# Allegro board geo-1.brd
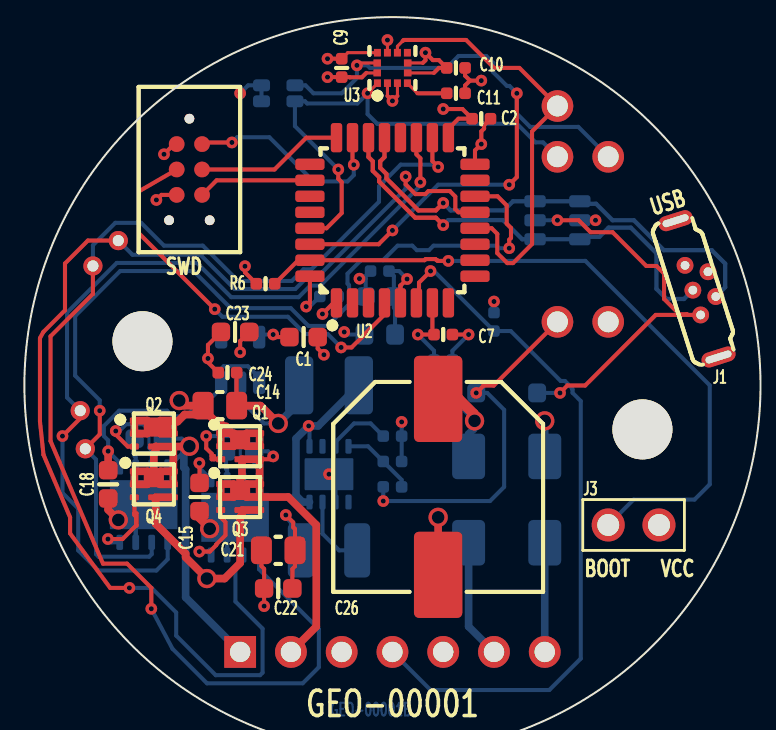
[diagram p0: board, top side]
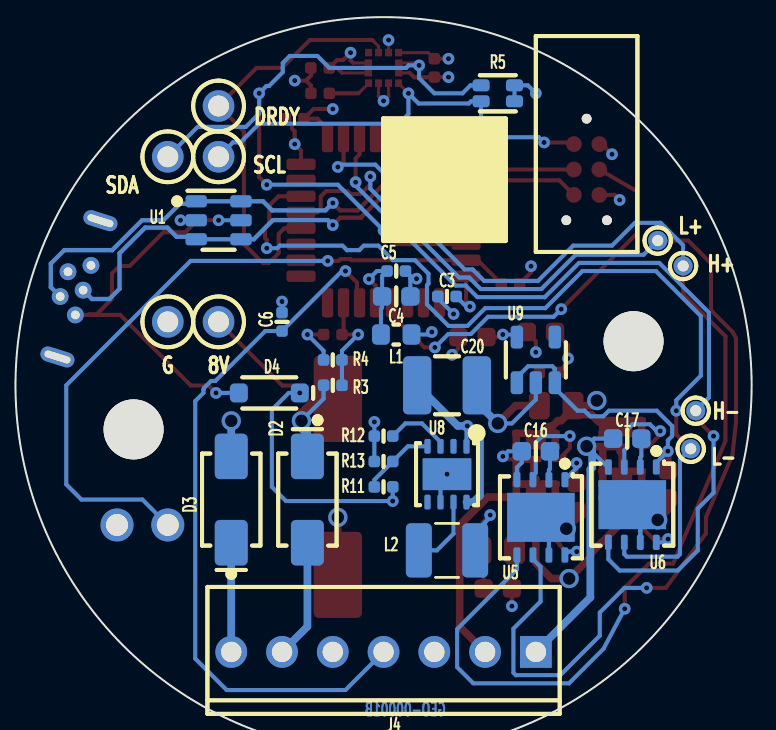
[diagram p1: board, bottom side, seen from below]

Outline 36.83 x 0 mm; copper layers: TOP, GPLANE, PPLANE, BOTTOM. Coordinates in mm from the lower left corner of the outline.

## Design rules (mm)
constraint set DEFAULT: min track width 0.203
net group DP1: nets DM DP

## Placement (name value [footprint] x y rotation side)
C1  10uF  [CAPC160X80X90L40N]  13.97 2.41 0 top
C2  0.1uF  [CAPC100X50X55L25N]  22.86 13.34 0 top
C3  0.1uF  [CAPC100X50X55L25N]  15.24 4.45 180 bottom
C4  10uF  [CAPC160X80X90L40N]  17.78 4.45 180 bottom
C5  0.1uF  [CAPC100X50X55L25N]  17.78 5.71 180 bottom
C6  1000pF  [CAPC100X50X55L25N]  23.49 3.17 90 bottom
C7  1000pF  [CAPC100X50X55L25N]  20.95 2.54 0 top
C9  0.1uF  [CAPC100X50X55L25N]  15.88 15.88 270 top
C10  0.1uF  [CAPC100X50X55L25N]  21.59 15.88 0 top
C11  0.1uF  [CAPC100X50X55L25N]  21.59 14.61 0 top
C14  1uF  [CAPC200X125X145L50N]  9.78 -1.02 0 top
C15  1uF  [CAPC160X80X90L40N]  8.76 -5.59 270 top
C16  0.1uF  [CAPC160X80X90L40N]  10.79 -3.3 0 bottom
C17  0.1uF  [CAPC160X80X90L40N]  6.22 -2.67 0 bottom
C18  1uF  [CAPC160X80X90L40N]  4.19 -4.95 270 top
C20  4.7uF  [CAPC330X260X280L60N]  15.24 0 180 bottom
C21  10uF  [CAPC200X125X145L50N]  12.7 -8.26 180 top
C22  0.1uF  [CAPC160X80X90L40N]  12.7 -10.16 180 top
C23  10uF  [CAPC160X80X90L40N]  10.54 2.67 0 top
C24  0.1uF  [CAPC100X50X55L25N]  10.16 0.64 0 top
C26  68uF  [CAPAE1030X1050L350X120N]  20.7 -5.08 270 top
D2  S1B-13-F  [DIOM519X260X240L114X145N]  22.22 -5.71 270 bottom
D3  S1B-13-F  [DIOM519X260X240L114X145N]  26.04 -5.71 90 bottom
D4  1N4148W  [SOD370X155X135L32X57]  24.13 -0.38 0 bottom
J1  614105150721  [CON_614105150721_WURTH]  33.66 4.83 107.5 top
J2  TC2030-NL  [TAG_TC2030-NL]  8.25 10.79 270 top
J3  -  [61300211121]  30.48 -6.99 180 top
J4  0022232071  [CON_0022232071_MOLEX]  10.79 -13.34 0 bottom
L1  600R@100MHz  [INDC160X80X100L30N]  17.78 2.54 0 bottom
L2  100uH  [INDC320X250X270L60N]  15.24 -8.26 180 bottom
NOREF  -  []  -101.6 -72.39 0 top
NOREF#2  -  [unnamed#2]  18.41 0 0 top
NOREF#3  -  []  18.41 13.34 180 bottom
Q1  CSD19538Q2  [XSTR_CSD19538Q2_TI]  10.79 -3.05 0 top
Q2  CSD19538Q2  [XSTR_CSD19538Q2_TI]  6.48 -2.41 0 top
Q3  CSD19538Q2  [XSTR_CSD19538Q2_TI]  10.79 -5.59 0 top
Q4  CSD19538Q2  [XSTR_CSD19538Q2_TI]  6.48 -4.95 0 top
R3  475k  [RESC100X50X40L25N]  20.95 0 180 bottom
R4  16.2k  [RESC100X50X40L25N]  20.95 1.27 0 bottom
R5  3.3k  [RESCAV4P80_165X165X70L30X60N]  12.7 14.61 270 bottom
R6  47k  [RESC100X50X40L25N]  12.06 5.08 180 top
R11  90.9k  [RESC100X50X40L25N]  18.41 -5.08 0 bottom
R12  365  [RESC100X50X40L25N]  18.41 -2.54 0 bottom
R13  10k  [RESC100X50X40L25N]  18.41 -3.81 0 bottom
TP7  TEST  [CON_TEST_POINT]  26.67 11.43 180 bottom
TP8  TEST  [CON_TEST_POINT]  29.21 11.43 180 bottom
TP9  TEST  [TP_30AWG]  3.43 5.97 180 bottom
TP10  TEST  [TP_30AWG]  4.7 7.24 180 bottom
TP11  TEST  [TP_30AWG]  3.05 -3.17 180 bottom
TP12  TEST  [TP_30AWG]  2.79 -1.27 180 bottom
TP14  TEST  [CON_TEST_POINT]  26.67 13.97 180 bottom
TP15  TEST  [CON_TEST_POINT]  29.21 3.17 180 bottom
TP16  TEST  [CON_TEST_POINT]  26.67 3.17 180 bottom
U1  USBLC6-2SC6  [SOT23-6P95_280X145L45X35N]  26.67 8.26 270 bottom
U2  STM32L412KBT6  [QFP32P80_900X900X160L60X37N]  18.41 8.26 0 top
U3  LIS3MDLTR  [PQFN12P50_200X200X70L27X25N]  18.41 15.88 0 top
U5  UCC27211ADRMR  [SON9P80_400X400X100L40X30T33-1]  10.54 -6.6 0 bottom
U6  UCC27211ADRMR  [SON9P80_400X400X100L40X30T33-1]  5.97 -5.97 0 bottom
U8  ADP2360ACPZ-R7  [SON9P65_300X300X80L40X27T244-1]  15.24 -4.45 0 bottom
U9  LT1761ES5-3.3  [SOT23-5P95_280X145L45X42N]  10.79 1.27 180 bottom

## Library data of the parts
C1-C7 C9-C11 C14-C18 C20-C24 = CAP_SHORT
C26 = CAP_POL_SHORT
D2-D4 = DIODE
J1 = CON_USB_MICROB_2_SHLD
J2 = CON6
J3 = JUMP 1x2
J4 = HEADER 7
L1 = BEAD FERRITE
L2 = IND
Q1-Q4 = NMOS_DDGSDDSD
R3 R4 R6 R11-R13 = RES
R5 = RES_DUAL
TP7-TP12 TP14-TP16 = TEST HOLE
U1 = IC_USBLC6-2_ST
U2 = IC_STM32L412KB_ST
U3 = IC_LIS3MDL_ST
U5 U6 = IC_UCC27211A_TI
U8 = IC_ADP2360_AD
U9 = IC_REG_FIXED_SOT23-5

## Footprints (pads in the part's own frame, mm; a bottom-side part is the same pattern mirrored in y, then rotated)
61300211121
  round 1.651 hole 1.1: 1(-1.27,0) 2(1.27,0)
CAPAE1030X1050L350X120N
  rrect 4.31x2.421 smd: 1(-4.399,0) 2(4.399,0)
CAPC100X50X55L25N
  rrect 0.579x0.579 smd: 1(-0.46,0) 2(0.46,0)
CAPC160X80X90L40N
  rrect 0.919x0.93 smd: 1(-0.706,0) 2(0.706,0)
CAPC200X125X145L50N
  rrect 1.049x1.379 smd: 1(-0.841,0) 2(0.841,0)
CAPC330X260X280L60N
  rrect 1.42x2.911 smd: 1(-1.491,0) 2(1.491,0)
CON_0022232071_MOLEX
  rect 1.59x1.59 hole 1.021: 1(0,0)
  round 1.59 hole 1.021: 2(2.54,0) 3(5.08,0) 4(7.62,0) 5(10.16,0) 6(12.7,0) 7(15.24,0)
CON_614105150721_WURTH
  round 0.841 hole 0.439: 1(-1.3,0.221) 2(-0.65,-0.78) 3(0,0.221) 4(0.65,-0.78) 5(1.3,0.221)
  oval 0.749x1.75 hole 0.351x1.349: 6(-3.574,0) 7(3.574,0)
CON_TEST_POINT
  round 1.58 hole 1.049: 1(0,0)
DIOM519X260X240L114X145N
  rrect 2.281x1.651 smd: 1(-2.159,0) 2(2.159,0)
INDC160X80X100L30N
  rrect 0.889x1.021 smd: 1(-0.765,0) 2(0.765,0)
INDC320X250X270L60N
  rrect 1.3x2.72 smd: 1(-1.41,0) 2(1.41,0)
PQFN12P50_200X200X70L27X25N
  rect 0.351x0.376 smd: 1(-0.75,-0.763) 2(-0.25,-0.763) 3(0.25,-0.763) 4(0.75,-0.763) 7(0.75,0.763) 8(0.25,0.763) 9(-0.25,0.763) 10(-0.75,0.763)
  rect 0.376x0.351 smd: 5(0.763,-0.25) 6(0.763,0.25) 11(-0.763,0.25) 12(-0.763,-0.25)
QFP32P80_900X900X160L60X37N
  rrect 0.569x1.46 smd: 1(-2.799,-4.13) 2(-1.999,-4.13) 3(-1.199,-4.13) 4(-0.399,-4.13) 5(0.399,-4.13) 6(1.199,-4.13) 7(1.999,-4.13) 8(2.799,-4.13) 17(2.799,4.13) 18(1.999,4.13) 19(1.199,4.13) 20(0.399,4.13) 21(-0.399,4.13) 22(-1.199,4.13) 23(-1.999,4.13) 24(-2.799,4.13)
  rrect 1.46x0.569 smd: 9(4.13,-2.799) 10(4.13,-1.999) 11(4.13,-1.199) 12(4.13,-0.399) 13(4.13,0.399) 14(4.13,1.199) 15(4.13,1.999) 16(4.13,2.799) 25(-4.13,2.799) 26(-4.13,1.999) 27(-4.13,1.199) 28(-4.13,0.399) 29(-4.13,-0.399) 30(-4.13,-1.199) 31(-4.13,-1.999) 32(-4.13,-2.799)
RESC100X50X40L25N
  rrect 0.579x0.579 smd: 1(-0.46,0) 2(0.46,0)
RESCAV4P80_165X165X70L30X60N
  rrect 0.599x0.851 smd: 1(-0.399,-0.836) 2(0.399,-0.836) 3(0.399,0.836) 4(-0.399,0.836)
SOD370X155X135L32X57
  rrect 0.899x0.95 smd: 1(-1.524,0) 2(1.524,0)
SON9P65_300X300X80L40X27T244-1
  rrect 0.31x0.739 smd: 1(-0.975,-1.394) 2(-0.325,-1.394) 3(0.325,-1.394) 4(0.975,-1.394) 5(0.975,1.394) 6(0.325,1.394) 7(-0.325,1.394) 8(-0.975,1.394)
  rrect 2.441x1.6 smd: 9(0,0)
SON9P80_400X400X100L40X30T33-1
  rrect 0.34x0.759 smd: 1(-1.199,-1.885) 2(-0.399,-1.885) 3(0.399,-1.885) 4(1.199,-1.885) 5(1.199,1.885) 6(0.399,1.885) 7(-0.399,1.885) 8(-1.199,1.885)
  rect 3.381x2.451 smd: 9(0,0)
SOT23-5P95_280X145L45X42N
  rrect 0.62x1.14 smd: 1(-0.95,-1.14) 2(0,-1.14) 3(0.95,-1.14) 4(0.95,1.14) 5(-0.95,1.14)
SOT23-6P95_280X145L45X35N
  rrect 0.61x1.069 smd: 1(-0.95,-1.12) 2(0,-1.12) 3(0.95,-1.12) 4(0.95,1.12) 5(0,1.12) 6(-0.95,1.12)
TAG_TC2030-NL
  round 0.483 hole 0.991: (-2.54,0) (2.54,1.016) (2.54,-1.016)
  round 0.787 smd: 1(-1.27,-0.635) 2(-1.27,0.635) 3(0,-0.635) 4(0,0.635) 5(1.27,-0.635) 6(1.27,0.635)
TP_30AWG
  round 0.96 hole 0.559: 1(0,0)
unnamed#2
  round 3 hole 3 unplated: (-12.507,2.205) (12.507,-2.205)
XSTR_CSD19538Q2_TI
  rrect 0.45x0.3 smd: 1(-0.975,0.65) 2(-0.975,0) 3(-0.975,-0.65) 4(0.975,-0.65) 5(0.975,0) 6(0.975,0.65)
  rrect 0.749x0.3 smd: 7(0.094,-0.65)
  rrect 1.001x0.95 smd: 8(0,0.325)

## Nets
AVCC: C4.1 C5.1 J4.5 L1.2 U2.5
GND: C1.2 C2.2 C3.2 C4.2 C5.2 C6.2 C7.2 C9.2 C10.2 C11.2 C14.2 C15.2 C18.2 C20.2 C21.2 C22.2 C23.2 C24.2 C26.2 D3.2 J1.5 J2.5 J4.3 Q3.4 Q3.7(S2) Q4.4 Q4.7(S2) R4.2 R6.2 R12.2 R13.2 TP15.1 U1.2 U2.16 U2.32 U3.2 U3.3 U3.9 U3.12 U5.7 U5.9 U6.7 U6.9 U8.6 U8.9 U9.2
V10: C15.1 C18.1 C21.1 C22.1 D4.1(K) L2.2 R11.1 TP16.1 U5.1(VD) U6.1(VD) U9.1 U9.3
VCC: C1.1 C2.1 C3.1 C9.1 C10.1 C23.1 C24.1 J2.1 J3.1 L1.1 R5.3 R5.4 U2.1 U2.17 U3.5 U3.6 U3.10 U9.5(VO)
VIN: C14.1 C20.1 C26.1 D2.1(K) Q1.1 Q1.2 Q1.5 Q1.6 Q1.8 Q2.1 Q2.2 Q2.5 Q2.6 Q2.8 R3.1 U8.1 U8.8(VIN)
VIN_MONITOR: C7.1 R3.2 R4.1 U2.7
DM: J1.2 U1.1 U1.6 U2.21
DP: J1.3 U1.3 U1.4 U2.22
DRDY: TP14.1 U2.12 U3.8
MOT_H_NEG: TP12.1 U2.19 U6.5
MOT_H_POS: TP9.1 U2.18 U5.5
MOT_L_NEG: TP11.1 U2.14 U6.6
MOT_L_POS: TP10.1 U2.13 U5.6
MOTOR+: C16.2 J4.2 Q1.4 Q1.7(S2) Q3.1 Q3.2 Q3.5 Q3.6 Q3.8 U5.4
MOTOR-: C17.2 J4.1 Q2.4 Q2.7(S2) Q4.1 Q4.2 Q4.5 Q4.6 Q4.8 U6.4
POT: C6.1 J4.4 U2.6
SCL: R5.2(B) TP7.1 U2.29 U3.1
SDA: R5.1 TP8.1 U2.30 U3.11(SDA)
N00874: Q2.3 U6.3
N00918: Q4.3 U6.8
N01958: R12.1 U8.3
N01966: R11.2 R13.1 U8.4
N02663: D2.2 J4.6
N02669: D3.1(K) J4.7
N06236: J2.2 U2.23
N06242: J2.3 U2.4
N06248: J2.4 U2.24
N06802: J2.6 U2.26(SWO)
N07422: J3.2 R6.1 U2.31
N08665: D4.2 J1.1(VB) U1.5(VB)
N019066: L2.1 U8.7
N20994: Q3.3 U5.8
N21027: Q1.3 U5.3
N21129: C16.1 U5.2
N21229: C17.1 U6.2
N103850: C11.1 U3.4

Pads without a net: J1 4 6 7; U2 2 3 8 9 10 11 15 20 25 27 28; U3 7; U8 2 5; U9 4

## Via types
v1: diameter 0.584, hole 0.254, TOP to BOTTOM, 63 vias
v2: diameter 0.965, hole 0.635, TOP to BOTTOM, 9 vias

## Routing (per net, layer and track width the routed paths; a pad name or vN(x,y) marks a point on that pad's centre or on a via; arc(x,y) is an arc through that point)
AVCC: length 10.5
  TOP w0.203: 18.82,4.99 18.81,4.98 U2.5 ; 18.82,4.99 v1(19.15,5.32) ; 18.82,4.99 18.82,4.12
  PPLANE w0.203: J4.5 20.95,-12.36 ; J4.5 20.95,-14.31 ; J4.5 19.98,-13.34 ; J4.5 21.93,-13.34
  BOTTOM w0.203: v1(19.15,5.32) 18.75,5.71 C5.1 18.49,5.47 C4.1 18.49,3.88 18.54,3.82 L1.2
GND: length 76.2
  TOP w0.152: U3.2 18.17,14.47 ; U3.3 18.66,14.47 ; U3.9 v1(18.17,17.27) ; U3.12 17.1,15.63
  TOP w0.203: C24.2 C14.2 ; C11.2 22.05,15 22.29,15.24 ; C10.2 22.05,15.48 22.29,15.24 ; v1(15.17,15.42) C9.2 16.27,15.42 16.28,15.41 16.88,15.41 17.1,15.63 ; J2.5 6.86,9.53 v1(6.6,9.27) ; v1(14.1,3.94) 14.28,4.12 U2.32 ; C1.2 14.68,1.84 v1(14.99,1.53) ; v1(11.99,-11.04) C22.2 11.99,-9.18 11.86,-9.05 C21.2 ; 18.17,14.47 v1(18.41,14.22) 18.66,14.47 ; 22.29,15.24 v1(22.86,15.24) ; C7.2 v1(22.22,2.54) ; C23.2 10.79,2.21 v1(10.79,1.66) ; R6.2 11.04,5.65 v1(11.04,5.96) ; C2.2 23,13.01 23,12.84 22.86,12.7 v1(22.86,12.06) 22.55,11.75 U2.16
  TOP w0.381: C26.2 v2(20.7,-6.6) ; Q4.4 Q4.7 6.57,-6.93 8.07,-8.42 8.07,-8.6 v2(9.13,-9.66) 10.02,-9.66 10.79,-8.89 10.79,-6.58 10.89,-6.49 Q3.7 Q3.4 ; v2(12.7,-1.91) 11.81,-1.02 C14.2 ; C15.2 8.76,-6.66 v2(9.27,-7.17) ; v2(4.7,-6.73) 4.19,-6.22 C18.2
  GPLANE w0.203: 15.88,-14.31 J4.3 ; J4.3 16.85,-13.34 ; J4.3 14.9,-13.34 ; J4.3 15.88,-12.36 ; 33.05,5.4 J1.5 ; J1.5 33.05,6.6 ; J1.5 32.45,6 ; 28.33,3.17 TP15.1 ; TP15.1 29.21,4.06 ; TP15.1 29.21,2.29 ; TP15.1 30.09,3.17
  BOTTOM w0.203: 5.57,-6.37 U6.9 5.46,-5.97 v2(4.7,-6.73) ; 5.57,-6.37 U6.7 ; 5.57,-6.37 5.57,-6.37 5.57,-7.85 ; 10.14,-7 10.14,-7.01 10.14,-8.49 ; 10.14,-7 U5.7 ; 10.14,-7 U5.9 9.84,-6.6 v2(9.27,-7.17) ; 17.07,5.33 v1(16.76,5.33) ; 17.07,5.33 C4.2 ; 17.07,5.33 17.07,5.47 C5.2 ; U1.2 v1(28.57,8.26) ; U8.6 15.57,-4.77 v1(15.24,-4.45) ; R4.2 21.41,1.73 v1(22.22,2.54) ; v1(14.1,3.94) 14.27,3.94 C3.2 ; R13.2 R12.2 v1(18.87,-1.83) ; U9.2 10.79,-0.71 11.99,-1.91 v2(12.7,-1.91) ; C6.2 v1(23.49,4.19)
  BOTTOM w0.381: D3.2 v2(26.04,-1.78) ; C20.2 13.75,-0.86 v2(12.7,-1.91)
V10: length 57.6
  TOP w0.203: C22.1 13.41,-9.18 13.54,-9.05 C21.1 13.54,-7.19 13.45,-7.1 13.45,-6.86 v1(13.08,-6.49) ; v1(8.76,-3.89) 8.76,-3.9 C15.1 ; TP16.1 23.48,-0.01 22.97,-0.01 v1(22.61,-0.38)
  TOP w0.381: v1(4.19,-3.29) C18.1
  PPLANE w0.203: v1(4.19,-3.29) 4.79,-3.89 v1(8.76,-3.89) 9.13,-3.52 10.11,-3.52 v1(13.08,-6.49) 13.45,-6.86 16.89,-6.86 v1(17.96,-5.79)
  BOTTOM w0.203: 13.33,-6.86 13.08,-6.6 v1(13.08,-6.49) ; 13.33,-6.86 13.33,-7.55 13.5,-7.71 13.5,-8.39 13.6,-8.49 ; 13.33,-6.86 13.83,-7.35 L2.2 ; U6.1 4.77,-3.87 v1(4.19,-3.29) 4.19,-2.75 3.98,-2.53 3.98,-2.04 4.74,-1.27 7.14,-1.27 7.42,-1.55 8.07,-1.55 8.35,-1.27 8.71,-1.27 9.85,-0.13 U9.3 9.85,0.83 9.97,0.96 11.18,0.96 11.74,0.39 U9.1 ; U5.1 8.76,-4.13 v1(8.76,-3.89) ; R11.1 v1(17.96,-5.79) 23.29,-5.79 24,-5.08 24,-1.23 23.16,-0.38 v1(22.61,-0.38)
VCC: length 24.1
  TOP w0.152: U3.5 20.49,15.63 ; U3.6 19.93,16.12 ; U3.10 16.18,16.64 C9.1
  TOP w0.203: v1(6.98,11.56) 7.49,12.06 J2.1 ; 20.49,15.63 20.74,15.88 C10.1 20.74,16.27 20.44,16.27 v1(20.07,16.64) 20.07,16.26 19.93,16.12 ; v1(14.91,3.57) 15.47,4.12 U2.1 ; C23.1 9.18,2.02 v1(9.18,1.34) 9.18,1.15 C24.1 ; v1(20.95,13.82) 21.92,13.82 C2.1 21.72,13.34 21.21,12.83 U2.17 ; v1(12.45,2.54) 12.57,2.41 C1.1 ; v1(15.17,16.33) C9.1
  PPLANE w0.203: 31.75,-7.99 31.75,-6.99 ; 31.75,-6.99 31.75,-5.98 ; 31.75,-6.99 32.75,-6.99
  BOTTOM w0.203: v1(14.91,3.57) 15.7,4.36 C3.1 ; U9.5 11.87,2.54 v1(12.45,2.54) ; R5.3 R5.4 11.19,15 v1(10.79,14.61) ; v1(16,2.67) 16.13,2.54 L1.1
VIN: length 33.9
  TOP w0.381: Q2.6 6.8,-1.76 Q2.8 ; Q2.8 7.17,-2.09 7.44,-1.82 ; Q2.8 6.8,-2.41 Q2.5 7.45,-1.83 7.44,-1.82 ; Q2.8 6.15,-2.41 Q2.2 Q2.1 6.15,-1.76 Q2.8 ; 7.44,-1.82 7.66,-1.82 8.02,-1.46 8.49,-1.46 C14.1 ; v2(7.75,-0.76) 8,-1.02 C14.1 ; Q1.8 10.47,-3.05 Q1.2 Q1.1 10.47,-2.4 Q1.8 ; Q1.8 11.12,-2.4 Q1.6 Q1.5 11.12,-3.05 Q1.8 ; Q1.8 10.65,-2.72 10.24,-2.31 10.24,-2.2 10.09,-2.05 9.99,-2.06 9.98,-2.06 9.69,-1.77 9.52,-1.77 8.94,-1.18 C14.1
  TOP w0.508: v2(22.52,-1.78) 22.48,-1.73 22.48,-1.42 21.73,-0.68 C26.1
  BOTTOM w0.203: U8.1 14.26,-2.07 v1(14.22,-2.03) ; R3.1 21.41,-0.67 v2(22.52,-1.78)
  BOTTOM w0.381: C20.1 14.7,-2.03 v1(14.22,-2.03) 13.59,-2.67 13.59,-5.51 13.92,-5.84 U8.8 ; D2.1 22.22,-2.44 22.48,-2.19 22.48,-1.82 v2(22.52,-1.78)
VIN_MONITOR: length 5.3
  TOP w0.203: U2.7 20.41,2.62 C7.1 v1(19.68,2.54)
  BOTTOM w0.203: v1(19.68,2.54) 20.5,1.73 R4.1 R3.2
DM: length 23.5
  TOP w0.216: U2.21 18.02,11.42 17.8,11.2 17.8,10.88 18.12,10.56 18.12,10.35 19.71,8.75 20.59,8.75 v1(20.95,9.12)
  BOTTOM w0.216: v1(20.95,9.12) 21.32,8.75 23.99,8.75 24.44,9.2 U1.6 U1.1 28.02,9.2 28.15,9.08 28.6,9.08 29.43,8.26 30.5,8.26 31.99,6.76 34.39,6.76 35.06,6.09 35.06,4.91 J1.2
DP: length 22.5
  TOP w0.216: U2.22 17.22,11.42 17.43,11.2 17.43,10.73 17.75,10.41 17.75,10.19 19.56,8.38 20.59,8.38 v1(20.95,8.01)
  BOTTOM w0.216: J1.3 33,4.32 32.13,4.32 31.62,4.83 31.62,6.6 30.34,7.89 29.23,7.89 28.77,7.43 28.15,7.43 28.02,7.31 U1.3 U1.4 24.91,7.31 23.95,8.26 21.2,8.26 v1(20.95,8.01)
DRDY: length 21.8
  TOP w0.152: 18.92,17.22 18.66,16.96 U3.8
  TOP w0.203: U2.12 23.38,7.86 23.66,7.57 23.66,6.61 24.16,6.11 24.45,6.11 25.4,7.07 25.4,12.7 TP14.1 24.77,15.88 23.49,15.88 22.1,17.27 18.98,17.27 18.92,17.22
MOT_H_NEG: length 43
  TOP w0.203: U2.19 19.61,11.55 19.81,11.35 v1(19.81,10.16) ; TP12.1 2.79,-1.65 v1(1.9,-2.54)
  BOTTOM w0.203: U6.5 7.17,-8.7 6.6,-9.26 3.7,-9.26 2.69,-8.26 2.69,-6.16 1.9,-5.38 v1(1.9,-2.54) ; TP12.1 2.13,-0.61 2.13,3.63 4.62,6.12 8.64,6.12 10.35,4.41 13.72,4.41 14.3,4.99 14.81,4.99 19.81,9.99 v1(19.81,10.16)
MOT_H_POS: length 62.2
  TOP w0.203: v1(6.35,-11.18) 6.35,-10.13 5.14,-8.92 3.93,-8.92 1.31,-2.79 1.31,2.45 3.43,4.57 TP9.1 ; v1(20.7,10.92) 20.41,11.21 U2.18
  BOTTOM w0.203: U5.5 11.74,-9.2 14.73,-12.19 14.73,-14.1 13.92,-14.9 9.14,-14.9 7.41,-13.18 v1(6.35,-11.18) ; TP9.1 3.43,7.01 4.55,8.13 5.84,8.13 6.98,6.99 8.93,6.99 10.69,5.22 13.38,5.22 13.96,5.8 14.36,5.8 17.74,9.18 17.74,9.95 18.83,11.04 20.58,11.04 v1(20.7,10.92)
MOT_L_NEG: length 47.2
  TOP w0.203: U2.14 23.67,9.45 24.13,9 24.13,8.08 24.35,7.87 24.35,7.37 24.26,7.28 v1(24.26,6.86) ; v1(3.77,-1.27) 3.77,-2.45 TP11.1
  BOTTOM w0.203: U6.6 6.37,-7.86 6.37,-8.45 6.24,-8.57 3.71,-8.57 3.58,-8.45 3.58,-3.71 TP11.1 ; v1(24.26,6.86) 23.73,6.86 23.61,6.99 20.47,6.99 20.24,6.76 19.63,6.76 19.41,6.99 18.67,6.99 17.95,6.26 16.84,6.26 16.17,5.58 16.17,5.09 16.24,5.01 16.24,4.05 15.16,2.97 14.22,2.97 13.33,3.86 10.32,3.86 8.47,5.71 4.79,5.71 2.54,3.46 2.54,0.48 3.77,-0.75 v1(3.77,-1.27)
MOT_L_POS: length 61
  TOP w0.203: v1(5.25,-10.13) 4.29,-10.13 2.29,-7.41 2.29,-6.6 0.96,-3.47 0.78,-1.81 0.78,2.36 0.95,2.67 2.03,3.75 2.03,6.1 3.17,7.24 TP10.1 ; v1(19.08,10.44) 19.08,10.05 19.56,9.56 20.06,9.56 20.21,9.72 21.29,9.72 21.56,9.44 21.56,8.81 21.71,8.65 U2.13
  BOTTOM w0.203: v1(19.08,10.44) 19.08,9.83 14.64,5.39 14.13,5.39 13.55,4.82 10.52,4.82 8.81,6.53 5.41,6.53 TP10.1 ; v1(5.25,-10.13) 6.37,-10.13 7.59,-11.36 7.59,-12.52 9.57,-14.5 11.79,-14.5 11.92,-14.37 11.92,-12.17 10.56,-10.81 10.56,-9.08 10.94,-8.7 10.94,-8.29 10.94,-8.29 U5.6
MOTOR+: length 23.1
  TOP w0.203: v1(12.45,-3.56) 12.3,-3.7 Q1.4
  TOP w0.381: Q3.8 10.47,-4.94 Q3.1 Q3.2 10.47,-5.59 Q3.8 ; Q3.8 11.12,-5.59 Q3.5 ; Q3.8 10.79,-4.69 10.89,-4.59 Q1.7 Q1.4 Q3.6 ; Q3.8 11.12,-4.94 Q3.6 ; Q3.6 Q3.5 ; Q3.5 13.21,-5.59 14.6,-6.99 14.6,-12.06 J4.2
  BOTTOM w0.203: U5.4 11.74,-4.11 11.5,-3.87 C16.2 12.19,-3.3 v1(12.45,-3.56)
MOTOR-: length 24.5
  TOP w0.381: Q4.6 6.8,-4.3 Q4.8 ; Q4.6 Q2.4 ; Q4.6 Q4.5 6.8,-4.95 Q4.8 ; Q4.8 6.15,-4.95 Q4.2 Q4.1 6.15,-4.3 Q4.8 ; Q4.8 6.48,-3.41 6.57,-3.31 Q2.7 Q2.4 ; v2(8.25,-3.05) 8.24,-3.06 Q2.4
  BOTTOM w0.203: v2(8.25,-3.05) 7.87,-2.67 C17.2 ; 7.98,-3.32 7.22,-4.08 U6.4
  BOTTOM w0.381: v2(8.25,-3.05) 7.98,-3.32 7.98,-4.11 8.07,-4.2 8.07,-10.61 J4.1
POT: length 36
  TOP w0.203: v1(20.32,5.71) 19.74,5.14 19.74,4.25 U2.6
  BOTTOM w0.203: v1(20.32,5.71) 20.5,5.71 C6.1 24.33,2.72 26.83,0.22 27.05,0.22 27.39,-0.13 27.39,-0.17 27.43,-0.21 27.43,-0.38 27.84,-0.79 27.84,-13.67 26.26,-15.24 20.32,-15.24 J4.4
SCL: length 24.5
  TOP w0.152: v1(17.17,14.61) 17.66,15.1 U3.1
  TOP w0.203: v1(15.71,10.79) 15.71,10.65 15.7,10.33 15.88,10.16 15.88,8.61 15.12,7.86 U2.29
  BOTTOM w0.203: v1(15.71,10.79) 13.54,12.96 R5.2 14.04,14.21 14.15,14.1 16.66,14.1 v1(17.17,14.61) 17.17,13.56 17.65,13.08 24.64,13.08 25.57,12.15 25.95,12.15 TP7.1
SDA: length 37
  TOP w0.152: U3.11 16.76,16.12
  TOP w0.203: U2.30 17.72,7.06 v1(18.41,7.75) ; 16.76,16.12 v1(16.64,16) ; v1(24.26,10.03) 24.64,10.41 v1(24.64,14.61)
  BOTTOM w0.203: v1(24.26,10.03) 20.7,10.03 v1(18.41,7.75) ; R5.1 14.06,15 14.46,14.61 15.88,14.61 16.64,15.37 v1(16.64,16) 17.16,16 17.29,15.88 21.13,15.88 21.72,16.47 23.11,16.47 23.46,16.12 23.46,15.66 24.14,14.97 24.27,14.97 v1(24.64,14.61) 24.64,13.59 25.3,12.93 27.71,12.93 TP8.1
N00874: length 5.2
  TOP w0.203: v1(4.57,-2.29) 4.57,-2.46 5.17,-3.06 Q2.3
  BOTTOM w0.152: 6.23,-3.12 6.23,-2.23
  BOTTOM w0.203: 6.23,-3.12 6.37,-3.26 6.37,-4.08 U6.3 ; v1(4.57,-2.29) 4.75,-2.29 5.09,-1.95 5.95,-1.95 6.23,-2.23
N00918: length 4.5
  TOP w0.203: 5.5,-6.4 5.5,-6.49 5.59,-6.58 5.59,-7.01 ; 5.5,-6.4 5.61,-6.4 5.61,-7.01 5.59,-7.01 ; 5.5,-6.4 Q4.3 ; 5.59,-7.01 4.91,-7.69 v1(4.18,-7.69)
  BOTTOM w0.203: v1(4.18,-7.69) 4.35,-7.85 U6.8
N01958: length 3.3
  BOTTOM w0.203: R12.1 17.32,-1.91 16.49,-1.91 15.57,-2.83 U8.3
N01966: length 3.7
  BOTTOM w0.203: U8.4 17.2,-3.05 R13.1 18.87,-4.73 R11.2
N02663: length 6
  BOTTOM w0.381: J4.6 22.22,-12.06 D2.2
N02669: length 5.5
  BOTTOM w0.381: D3.1 J4.7
N06236: length 10.7
  TOP w0.203: J2.2 8.97,12.15 v1(10.38,12.15) ; v1(16.48,11.03) 16.42,11.09 U2.23
  BOTTOM w0.203: v1(10.38,12.15) 10.65,12.41 12.26,12.41 14.47,10.2 16.17,10.2 16.48,10.51 v1(16.48,11.03)
N06242: length 20.2
  TOP w0.203: v1(15.85,1.89) 16.37,1.89 18.02,3.54 U2.4 ; v1(9.52,3.81) 5.73,7.6 5.73,9.7 J2.3
  BOTTOM w0.203: v1(15.85,1.89) 15.18,2.57 14.05,2.57 13.18,3.43 9.91,3.43 v1(9.52,3.81)
N06248: length 7.4
  TOP w0.203: J2.4 12.51,10.79 14.1,12.39 U2.24
N06802: length 5.7
  TOP w0.203: U2.26 9.62,10.25 J2.6
N07422: length 35.8
  TOP w0.203: v1(21.21,6.22) 20.69,6.22 20.65,6.26 20.62,6.26 20.57,6.31 20.07,6.31 20.02,6.26 U2.31 13.7,6.26 R6.1
  BOTTOM w0.203: J3.2 30.48,-5.71 33.53,-5.71 34.29,-4.95 34.29,0 28.07,6.22 v1(21.21,6.22)
N08665: length 20.1
  TOP w0.203: v1(26.8,-0.38) 27.17,-0.01 28.06,-0.01 31.59,3.52 33.19,3.52 ; v1(26.67,8.26) 27.73,8.26 28.33,7.66 29.43,7.66 31.11,5.97 31.63,5.97 32,5.59 32,4.32 32.77,3.56 33.15,3.56 33.19,3.52 ; 33.19,3.52 J1.1
  BOTTOM w0.203: v1(26.67,8.26) U1.5 ; v1(26.8,-0.38) D4.2
N019066: length 3.7
  BOTTOM w0.203: U8.7 14.91,-7.42 15.75,-8.26 L2.1
N20994: length 3.7
  TOP w0.203: Q3.3 9.82,-6.61 10.06,-6.85 10.06,-7.5 9.6,-7.96 9.6,-7.99 9.28,-8.32 v1(8.75,-8.32)
  BOTTOM w0.203: U5.8 9.17,-8.32 v1(8.75,-8.32)
N21027: length 6.2
  TOP w0.203: v1(9.1,-2.54) 9.1,-3.15 9.37,-3.42 9.37,-3.54 ; 9.49,-3.7 9.49,-3.54 9.37,-3.54 ; 9.49,-3.7 9.37,-3.7 9.37,-3.54 ; 9.49,-3.7 Q1.3
  BOTTOM w0.152: 10.8,-3.74 10.8,-2.87 ; 10.79,-3.81 10.79,-3.75
  BOTTOM w0.203: 10.79,-3.75 10.8,-3.74 ; 10.79,-3.81 10.79,-4.36 10.94,-4.51 10.94,-4.92 10.94,-4.92 U5.3 ; 10.8,-2.87 10.48,-2.54 v1(9.1,-2.54)
N21129: length 1.4
  BOTTOM w0.203: U5.2 10.14,-4.24 10.09,-4.18 C16.1
N21229: length 1.4
  BOTTOM w0.203: C17.1 5.52,-3.55 5.57,-3.6 5.57,-4.08 U6.2
N103850: length 2.2
  TOP w0.152: 19.17,15.1 19.66,14.61
  TOP w0.203: 19.16,15.12 19.17,15.1 U3.4 ; 19.66,14.61 C11.1

## Copper pours and planes (outline as drawn; the poured copper is in the pictures)
AVCC on PPLANE: 18.47,5.59 30.99,5.59 30.99,-12.74 25.21,-16.56 18.41,-17.9 16.56,-17.8 14.73,-17.51 14.73,-11.56 22.1,-11.56 22.1,-14.61 22.14,-14.69 22.22,-14.73 27.3,-14.73 27.39,-14.69 27.43,-14.61 27.43,-2.54 27.39,-2.45 27.3,-2.41 23.62,-2.41 23.62,1.91 23.58,1.99 23.49,2.03 17.91,2.03 17.91,5.03
GND on GPLANE: 0.52,0 36.31,0
VCC on PPLANE: 18.41,17.9 36.31,0 35,-6.74 31.24,-12.48 31.24,5.71 31.2,5.8 31.11,5.84 18.41,5.84 18.37,5.83 18.33,5.8 17.69,5.17 17.66,5.13 17.65,5.08 17.65,2.03 11.43,2.03 11.34,1.99 11.3,1.91 11.3,0.13 5.08,0.13 4.99,0.09 4.95,0 4.95,-1.78 0.61,-1.78 0.54,-0.89 0.52,0
VIN on PPLANE: 11.56,1.78 23.37,1.78 23.37,-2.54 23.41,-2.63 23.49,-2.67 27.18,-2.67 27.18,-14.48 22.35,-14.48 22.35,-11.43 22.31,-11.34 22.22,-11.3 14.6,-11.3 14.52,-11.34 14.48,-11.43 14.48,-17.46 5.1,-11.95 0.63,-2.03 5.08,-2.03 5.17,-1.99 5.21,-1.91 5.21,-0.13 11.43,-0.13 11.52,-0.09 11.56,0

## Text on the board
BOTTOM: GEO-00001B
Ref Des/Silkscreen Top: SWD | BOOT | VCC | USB | GEO-00001
DISPLAY_TOP: FIGURE | FINISHED_SIZE | 10.0 | 17.3 | 22.0 | 25.0 | 39.0 | 40.2 | 43.3 | 118.1 | 53.1x13.8 | DRILL CHART: TOP to BOTTOM | ALL UNITS ARE IN MILS | ROTATION | - | 17.500 | PLATED | NON-PLATED | QTY | 71 | 5 | 12 | 9 | 3 | 7 | 2
